# Altium PCB AFE.PcbDoc (part 2 of 3)
Units mm, origin at the board's own origin, x right, y up, seen from the top; angles counter-clockwise.
Board outline 95 x 50 mm, 4 copper layers (Top Layer, Ground Plane, +5V Power Plane, Bottom Layer), stack 0.778 mm thick; 152 components, 132 nets, 460 pads, 163 vias.
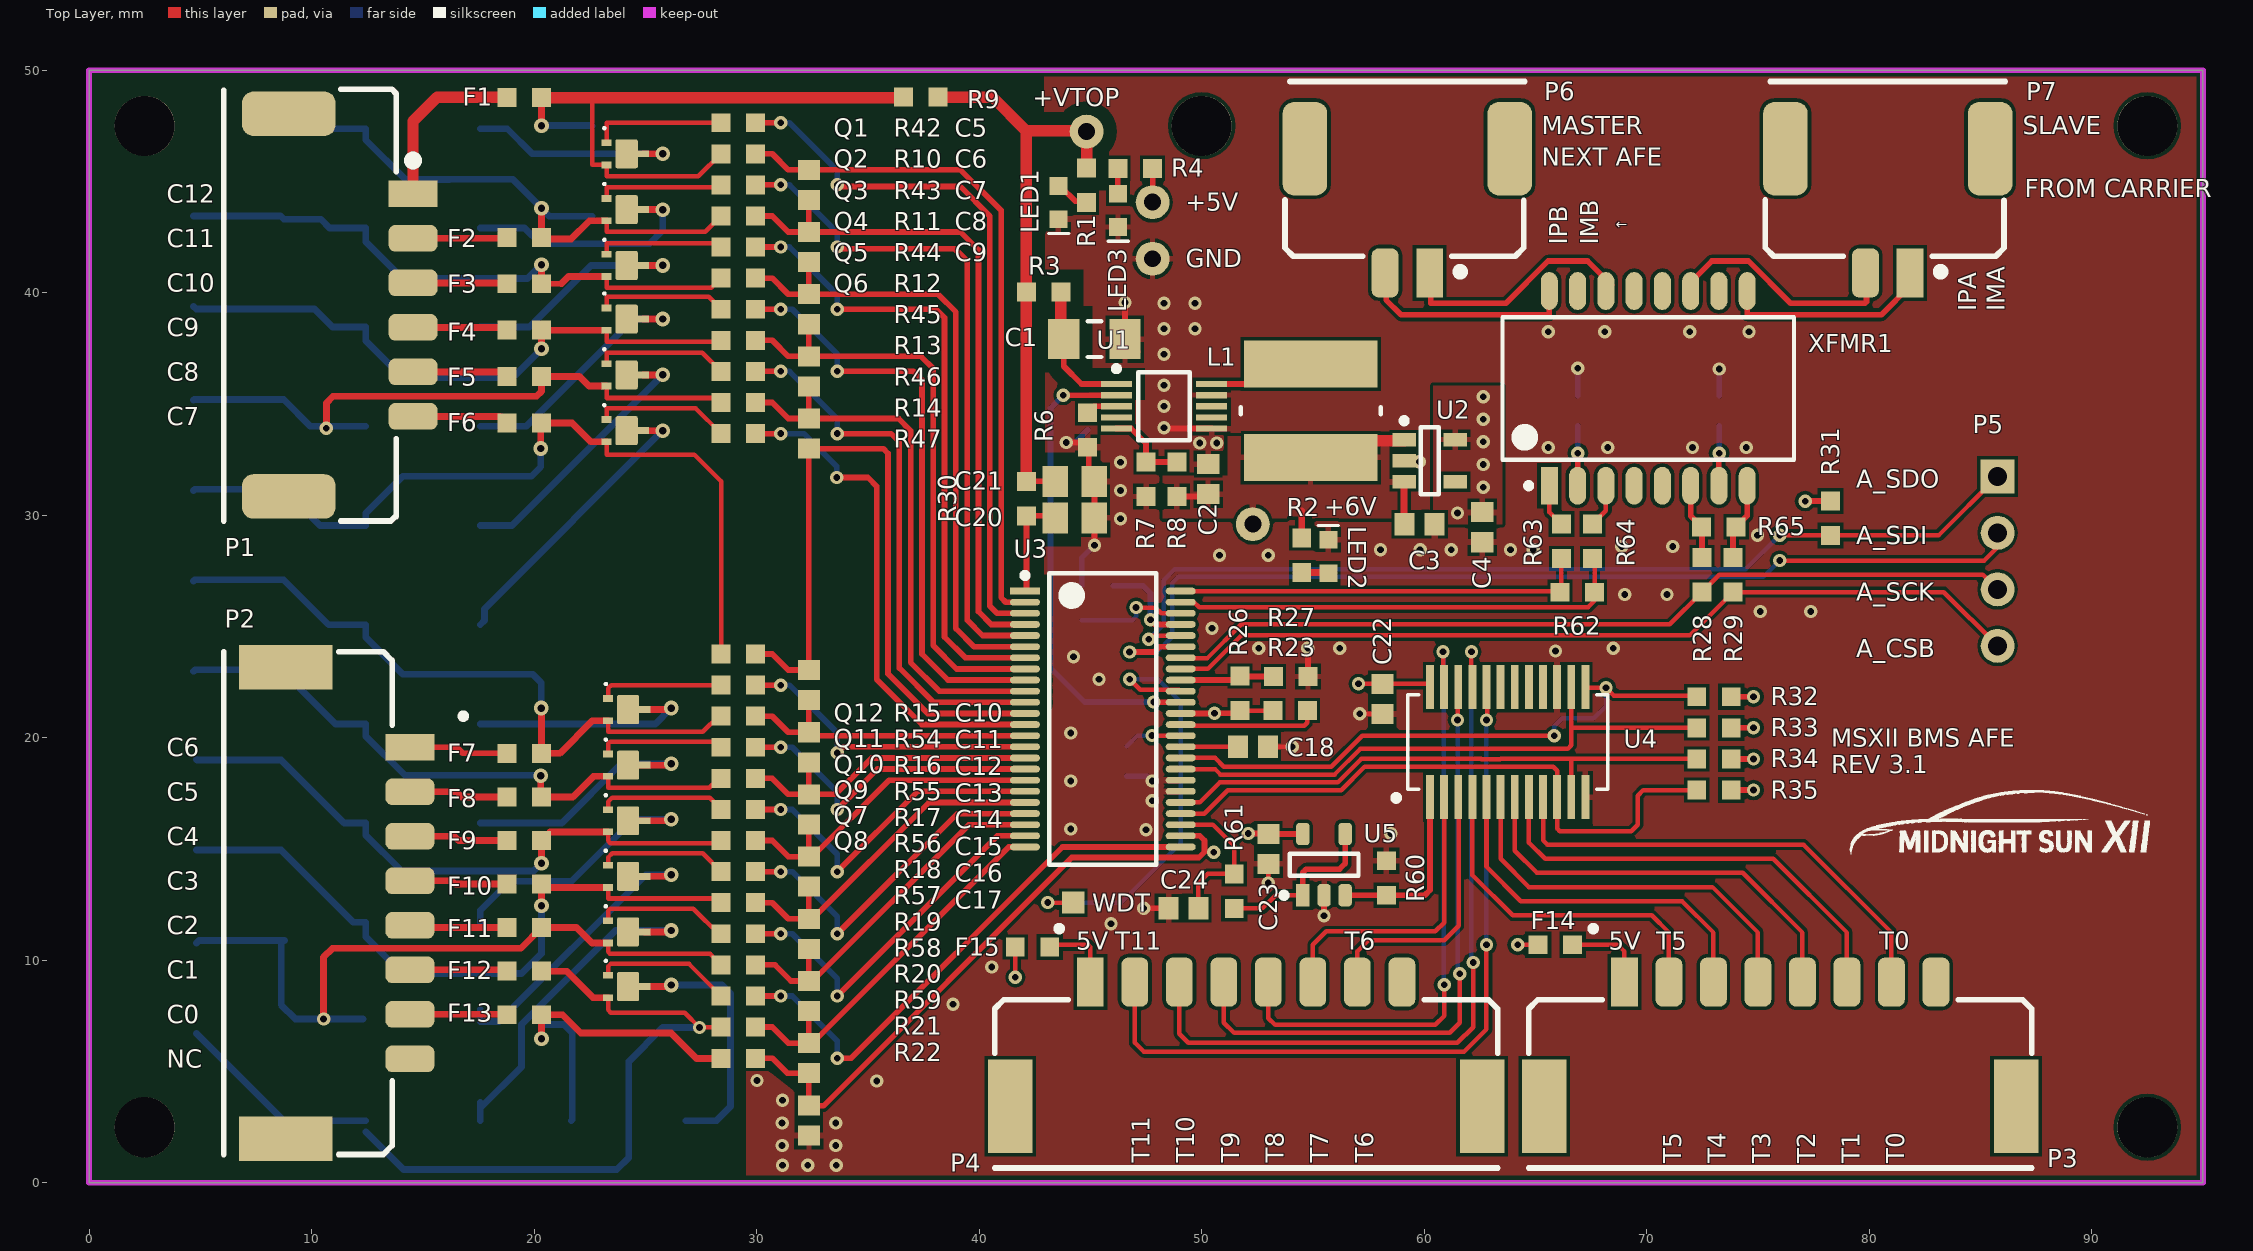
[diagram p0: Top Layer view]

## Part data (continued)
R31 R32 R33 R34 R35: "4.7k Ohm ±1% 0.1W, 1/10W Chip Resistor 0603 (1608 Metric) Moisture Resistant Thick Film", Manufacturer 1=Yageo, Manufacturer Part Number 1=RC0603FR-074K7L, Operating Temperature="-55°C ~ 155°C", Package / Case="0603 (1608 Metric)", Power (Watts)=1/10W, Resistance (Ohms)=4.7k, Supplier Device Package=0603, Supplier Part Number 1=311-4.70KHRCT-ND, Temperature Coefficient=±100ppm/°C, Tolerance=±1%, Category=Resistors, ComponentLink1Description=http://www.yageo.com/documents/recent/PYu-RC_Group_51_RoHS_L_7.pdf, ComponentLink1URL=http://www.yageo.com/documents/recent/PYu-RC_Group_51_RoHS_L_7.pdf, Composition="Thick Film", Description 1="RES SMD 4.7K OHM 1% 1/10W 0603", Failure Rate=-, Features="Moisture Resistant", Height - Seated (Max)="0.022\" (0.55mm)", Packaging="Cut Tape (CT)", Part Status=Active, Pricing 1="1=0.16, 10=0.022, 100=0.0089, 1000=0.00402, 2500=0.00349 (CAD)", RoHS="RoHS Compliant", Size / Dimension="0.063\" L x 0.031\" W (1.60mm x 0.80mm)", Stock 1=3487566, Supplier 1=Digi-Key
R36 R37 R38 R39 R40 R41 R48 R49 R50 R51 R52 R53: "15 Ohm ±1% 2W Chip Resistor 2512 (6432 Metric) Thick Film", Manufacturer 1="TE Connectivity Passive Product", Manufacturer Part Number 1=352115RFT, Operating Temperature="-55°C ~ 155°C", Package / Case="2512 (6432 Metric)", Power=2W, Resistance=15, Supplier Device Package=-, Supplier Part Number 1=A115988CT-ND, Temperature Coefficient=±100ppm/°C, Tolerance=±1%, ComponentLink1Description=http://www.te.com/commerce/DocumentDelivery/DDEController?Action=srchrtrv&DocNm=9-1773463-5&DocType=DS&DocLang=English, ComponentLink1URL=http://www.te.com/commerce/DocumentDelivery/DDEController?Action=srchrtrv&DocNm=9-1773463-5&DocType=DS&DocLang=English, Composition="Thick Film", Failure Rate=-, Height - Seated (Max)="0.026\" (0.65mm)", Packaging="Cut Tape (CT)", Part Status=Active, Size / Dimension="0.248\" L x 0.126\" W (6.30mm x 3.20mm)", Supplier 1=Digi-Key
R62 R65: "RES SMD 120 OHM 1% 1/10W 0603", Manufacturer 1=Yageo, Manufacturer Part Number 1=RC0603FR-07120RL, Operating Temperature="-55°C ~ 155°C", Package / Case="0603 (1608 Metric)", Power=1/10W, Resistance=120, Supplier Device Package=0603, Supplier Part Number 1=311-120HRCT-ND, Temperature Coefficient=±100ppm/°C, Tolerance=±1%, ComponentLink1Description=http://www.yageo.com/documents/recent/PYu-RC_Group_51_RoHS_L_7.pdf, ComponentLink1URL=http://www.yageo.com/documents/recent/PYu-RC_Group_51_RoHS_L_7.pdf, Composition="Thick Film", Failure Rate=-, Height - Seated (Max)="0.022\" (0.55mm)", Packaging="Cut Tape (CT)", Part Status=Active, Size / Dimension="0.063\" L x 0.031\" W (1.60mm x 0.80mm)", Supplier 1=Digi-Key
U1: "Buck Switching Regulator IC Positive Adjustable 0.8V 1 Output 100mA 10-TFSOP, 10-MSOP (0.118\", 3.00mm Width)", Current - Output=100mA, Frequency - Switching="100kHz ~ 2.2MHz", Manufacturer 1="Maxim Integrated", Manufacturer Part Number 1=MAX17552AUB+, Operating Temperature="-40°C ~ 125°C (TJ)", Package / Case="10-TFSOP, 10-MSOP (0.118\", 3.00mm Width)", Supplier Device Package=10-uMAX, Supplier Part Number 1=MAX17552AUB+-ND, Voltage - Input (Max)=60V, Voltage - Input (Min)=4V, Voltage - Output (Max)=54V, Voltage - Output (Min/Fixed)=0.8V, ComponentLink1Description=http://datasheets.maximintegrated.com/en/ds/MAX17552.pdf, ComponentLink1URL=http://datasheets.maximintegrated.com/en/ds/MAX17552.pdf, Function=Step-Down, Mounting Type="Surface Mount", Number of Outputs=1, Output Configuration=Positive, Output Type=Adjustable, Packaging=Tube, Part Status=Active, Supplier 1=Digi-Key, Synchronous Rectifier=Yes, Topology=Buck
U2: "Linear Voltage Regulator IC Positive Fixed Output 5V 100mA SOT-23-5", Current - Limit (Min)=-, Current - Output=100mA, Manufacturer 1=STMicroelectronics, Manufacturer Part Number 1=LD2981CM50TR, Operating Temperature="-40°C ~ 125°C", Package / Case="SC-74A, SOT-753", Supplier Device Package=SOT-23-5, Supplier Part Number 1=497-7787-1-ND, Voltage - Dropout (Typical)="0.18V @ 100mA", Voltage - Input="Up to 16V", Voltage - Output=5V, ComponentLink1Description=http://www.st.com/content/ccc/resource/technical/document/datasheet/group1/b7/b5/a1/83/9c/bd/4a/90/CD00001635/files/CD00001635.pdf/jcr:content/translations/en.CD00001635.pdf, ComponentLink1URL=http://www.st.com/content/ccc/resource/technical/document/datasheet/group1/b7/b5/a1/83/9c/bd/4a/90/CD00001635/files/CD00001635.pdf/jcr:content/translations/en.CD00001635.pdf, Mounting Type="Surface Mount", Packaging="Cut Tape (CT)", Part Status=Active, Regulator Topology="Positive Fixed", Supplier 1=Digi-Key
U3: "Battery Battery Monitor IC Multi-Chemistry 48-SSOP", Manufacturer 1="Linear Technology", Manufacturer Part Number 1=LTC6804IG-1#PBF, Operating Temperature="-40°C ~ 85°C (TA)", Package / Case="48-FSOP (0.209\", 5.30mm Width)", Supplier Device Package=48-SSOP, Supplier Part Number 1=LTC6804IG-1#PBF-ND, Battery Chemistry=Multi-Chemistry, ComponentLink1Description=http://www.linear.com/docs/43171, ComponentLink1URL=http://www.linear.com/docs/43171, Fault Protection="Over/Under Voltage", Function="Battery Monitor", Interface="I²C, SPI", Number of Cells="1 ~ 12", Packaging=Tube, Part Status=Active, Supplier 1=Digi-Key
U4: "1 Circuit IC Switch 16:1 160 Ohm 24-SSOP", Channel Capacitance (CS(off), CD(off))="5pF, 50pF", Current - Leakage (IS(off)) (Max)=800nA, Manufacturer 1="Texas Instruments", Manufacturer Part Number 1=CD74HC4067SM96, On-State Resistance (Max)="160 Ohm", Operating Temperature="-55°C ~ 125°C (TA)", Package / Case="24-SSOP (0.209\", 5.30mm Width)", Supplier Device Package=24-SSOP, Supplier Part Number 1=296-9226-1-ND, Voltage - Supply, Dual (V±)=-, Voltage - Supply, Single (V+)="2 V ~ 6 V", -3db Bandwidth=89MHz, Channel-to-Channel Matching (&Delta;Ron)="8.5 Ohm", Charge Injection=-, ComponentLink1Description=http://www.ti.com/lit/ds/symlink/cd74hc4067.pdf, ComponentLink1URL=http://www.ti.com/lit/ds/symlink/cd74hc4067.pdf, Crosstalk=-, Multiplexer/Demultiplexer Circuit=16:1, Number of Circuits=1, Packaging="Cut Tape (CT)", Part Status=Active, Supplier 1=Digi-Key, Switch Circuit=-, Switch Time (Ton, Toff) (Max)="51ns, 49ns"
U5: "General Purpose Amplifier 1 Circuit Rail-to-Rail SOT-23-5", Current - Output / Channel=50mA, Current - Supply=400µA, Manufacturer 1="Texas Instruments", Manufacturer Part Number 1=TLV316QDBVRQ1, Operating Temperature="-40°C ~ 125°C", Package / Case="SC-74A, SOT-753", Supplier Device Package=SOT-23-5, Supplier Part Number 1=296-45323-1-ND, Voltage - Supply, Single/Dual (±)="1.8 V ~ 5.5 V, ±0.9 V ~ 2.75 V", -3db Bandwidth=-, Amplifier Type="General Purpose", Category="Integrated Circuits (ICs)", ComponentLink1Description=http://www.ti.com/lit/ds/symlink/tlv316-q1.pdf, ComponentLink1URL=http://www.ti.com/lit/ds/symlink/tlv316-q1.pdf, Description 1="IC OP AMP GP RR 10MHZ 5-SOT-23", Mounting Type="Surface Mount", Number of Circuits=1, Output Type=Rail-to-Rail, Packaging="Cut Tape (CT)", Part Status=Active, Pricing 1="1=1.33, 10=1.185, 100=0.9234, 500=0.76276, 1000=0.60218 (CAD)", RoHS="RoHS Compliant", Slew Rate="6 V/µs", Stock 1=1747, Supplier 1=Digi-Key
WDT: library part "Test Point"
XFMR1: "PULSE XFMR 1CT:1CT 350UH SMD", Inductance=350uH, Isolation Voltage=1.5kVrms, Manufacturer="Bourns Inc.", Supplier Part Number 1=PT61018AAPEL-SCT-ND, MFG_PN=PT61018AAPEL-S, Supplier=Digikey, Supplier 1=Digi-Key, Supplier_PN=PT61018AAPEL-SCT-ND

## Free pads (board coordinates)
  round 2.7 hole 2.7: ""(2.5,2.5) ""(2.5,47.5) ""(50,47.5) ""(92.5,2.5) ""(92.5,47.5)

## Via types
v1: diameter 0.6, hole 0.3, Top Layer to Bottom Layer, tented both sides, 141 vias
v2: diameter 0.66, hole 0.33, Top Layer to Bottom Layer, tented both sides, 22 vias

## Nets (pads, with @x,y where several pads share a name; then routed paths per layer and width w, separated by ;. In a path a pad name is that pad's centre, name@x,y a point inside that pad or via, vN(x,y) a via of type N, cw(c..) or ccw(c..) an arc to the next point about the centre after c; other vN are vias at no path point)
+5V: +5V.TH_TP C4.1 C22.1 C23.1 F14.2 F15.2 R4.1 R23.1 R26.2 R31.1 R32.2 R33.2 R34.2 R35.2 U2.5 U3.37 U4.24 U5.5 | length 18.6
  Top Layer w0.203: v1(41.625,9.239) F15.2@41.625,10.7 ; R26.2@51.72,21.221 53.196,21.221 R23.1@53.2,21.225 ; v1(57.05,22.425) C22.1@58.125,22.425 60.112,22.425 U4.24@60.261,22.276 ; v1(64.2,10.7) F14.2@65.125,10.7
  Top Layer w0.254: +5V.TH_TP@47.799,44.069 R4.1@47.799,45.584 ; U3.37@49.06,21.095 v1@50.311,21.095 ; v1(50.577,21.107) R26.2@51.606,21.107 ; v1(52.1,15.7) 52.975,15.7 C23.1@53,15.675 U5.5@54.55,15.675 ; U4.24@60.261,22.276 U4.24@60.3,22.314 ; R35.2@73.8,17.653 v1(74.803,17.653) ; R34.2@73.8,19.05 v1(74.803,19.05) ; R33.2@73.8,20.447 v1(74.803,20.447) ; R32.2@73.8,21.844 v1(74.803,21.844) ; v1@77.133,30.645 R31.1@78.263,30.645
  other v1: 61.5,30.1 77.12,30.632 62.658,31.267 62.658,32.283 62.658,33.299 62.658,34.315 62.658,35.331